# EAGLE board Board1 (EAGLE 8.4.2)
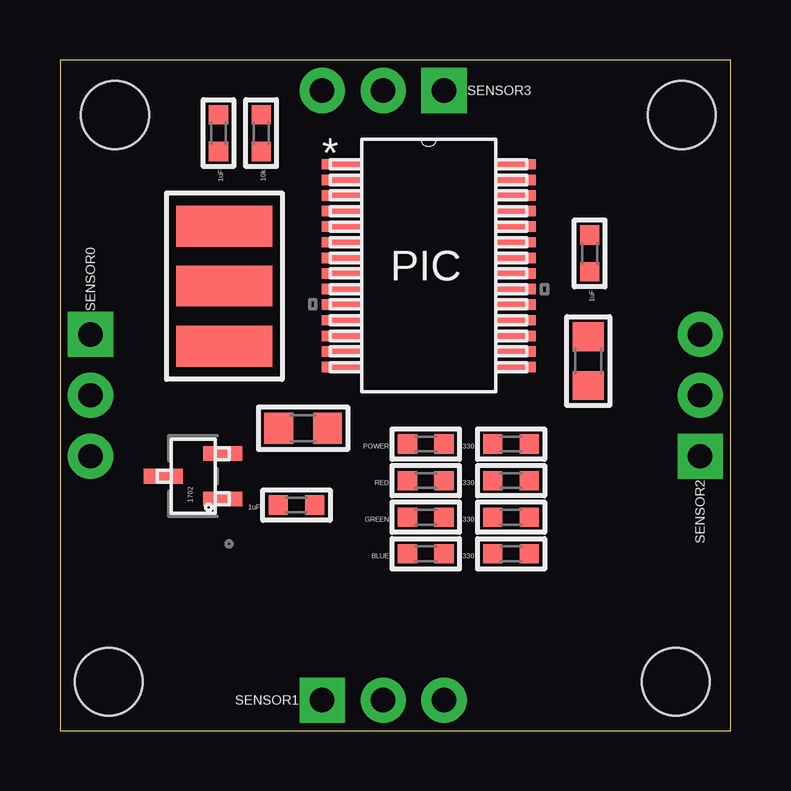
[diagram p0: board, top side]
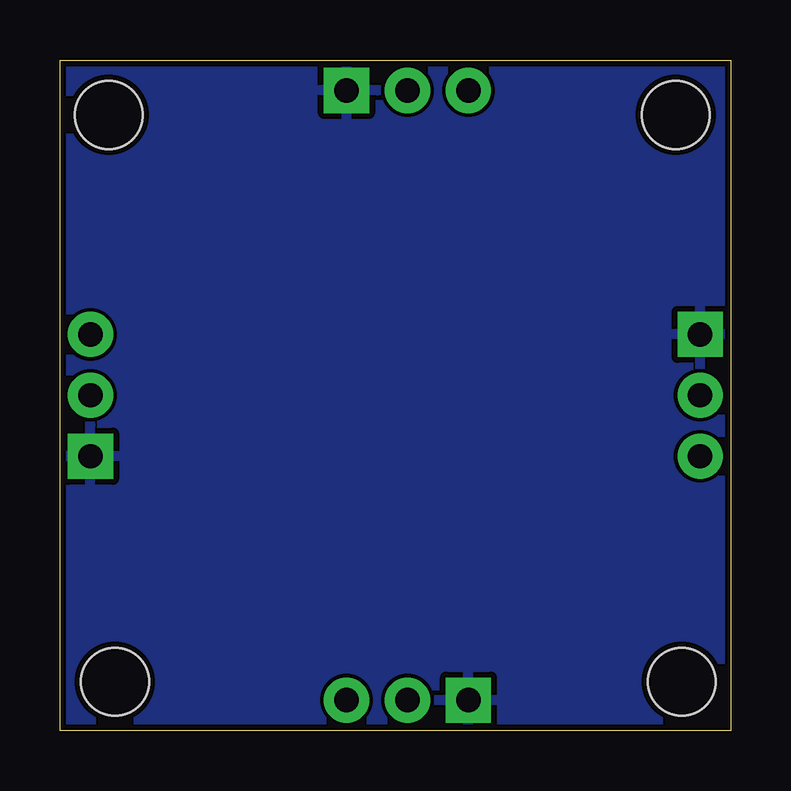
[diagram p1: board, bottom side, seen from below]

Size 27.94 x 27.94 mm. Coordinates in mm from the lower left corner, seen from the top.
Outline: 0,0 27.94,0 27.94,27.94 0,27.94 0,0
Copper layers (1*16): Top 0.035mm / dielectric 1.5mm / Bottom 0.035mm
Design rules "SeeedStudio_2layer_DRU_no_angle_20140221": minimum track width 6mil, minimum drill 12mil, track to track 6mil, track to pad 6mil, pad to pad 6mil, via to via 6mil, smd to smd 0mil, copper to edge 10mil, drill to drill 10mil, minimum pad ring 10mil, minimum via ring 6mil, stop-mask expansion 2mil, vias tented up to drill 100mil, thermal gap 10mil
Holes 2.83 mm at 2.29,25.65 25.91,25.65 2.03,2.03 25.65,2.03

## Footprints (pad centres in the part's own frame; a part is rotated, then mirrored left to right if it is on the bottom)
REGULATOR3P = smd 0.61 x 1.626: 1 -0.95,-1.245; 2 0.95,-1.245; 3 0,1.245
L0603 = smd 0.8 x 0.8: 1 -0.762,0; 2 0.762,0
C0603 = smd 0.8 x 0.8: 1 -0.762,0; 2 0.762,0
C0805 = smd 1.2 x 1.3: 1 -1.016,0; 2 1.016,0
PIC32SSOP = smd 1.676 x 0.432: 1 -3.617,4.225; 2 -3.617,3.575; 3 -3.617,2.925; 4 -3.617,2.275; 5 -3.617,1.625; 6 -3.617,0.975; 7 -3.617,0.325; 8 -3.617,-0.325; 9 -3.617,-0.975; 10 -3.617,-1.625; 11 -3.617,-2.275; 12 -3.617,-2.925; 13 -3.617,-3.575; 14 -3.617,-4.225; 15 3.617,-4.225; 16 3.617,-3.575; 17 3.617,-2.925; 18 3.617,-2.275; 19 3.617,-1.625; 20 3.617,-0.975; 21 3.617,-0.325; 22 3.617,0.325; 23 3.617,0.975; 24 3.617,1.625; 25 3.617,2.275; 26 3.617,2.925; 27 3.617,3.575; 28 3.617,4.225
R0603 = smd 0.8 x 0.8: 1 -0.762,0; 2 0.762,0
OSC = smd 1.7 x 4: 1 -2.497,-0.499; 2 -0.012,-0.501; 3 2.499,-0.508
VIVE = drill 1.016 pad 1.88: +3.3 2.54,0; S 5.08,0 | drill 1.016 pad 1.88 square: GND 0,0

## Placement (x,y rotation side)
1702  REGULATOR  [REGULATOR3P]  5.55,10.6 90 top
BLUE  BLUE  [L0603]  15.24,7.37 180 top
CAP1  1uF  [C0603]  9.85,9.4 180 top
CAP2  10uF  [C0805]  10.13,12.6 180 top
CAP3  1uF  [C0603]  6.6,24.89 270 top
CAP4  10uF  [C0805]  22.01,15.4 270 top
CAP5  1uF  [C0603]  22.07,19.88 270 top
GREEN  GREEN  [L0603]  15.24,8.89 180 top
PIC  PIC32-MX250F128BSSOP  [PIC32SSOP]  15.36,19.37 0 top
POWER  POWER  [L0603]  15.24,11.94 180 top
RED  RED  [L0603]  15.24,10.41 180 top
RES1  330  [R0603]  18.8,11.94 180 top
RES2  10k  [R0603]  8.38,24.89 270 top
RES3  330  [R0603]  18.8,10.41 180 top
RES4  330  [R0603]  18.8,8.89 180 top
RES5  330  [R0603]  18.8,7.37 180 top
RESONATOR  8MHZ  [OSC]  7.35,18.51 270 top
SENSOR0  VIVE  [VIVE]  1.27,16.51 270 top
SENSOR1  VIVE  [VIVE]  10.92,1.27 0 top
SENSOR2  VIVE  [VIVE]  26.67,11.43 90 top
SENSOR3  VIVE  [VIVE]  16,26.67 180 top

## Library data of the parts
1702 BLUE CAP1-CAP5 GREEN PIC POWER RED RES1-RES5 RESONATOR SENSOR0 SENSOR1-SENSOR3 = 433

## Nets
GND: SENSOR0.GND SENSOR1.GND SENSOR2.GND SENSOR3.GND
N$11: PIC.13
RB8: PIC.17
RB13: PIC.24
RB15: PIC.26

## Tracks (layer width: path | path; a pad name or v marks a point on that pad's centre or on a via)
GND
  pour Bottom: 0,27.94 27.94,27.94 27.94,0 0,0